# EAGLE board blank_card (EAGLE 9.6.2)

Size 100 x 80 mm. Coordinates in mm from the lower left corner, seen from the top.
Outline: 0,0 100,0 100,80 0,80 0,0
Copper layers (1*16): Top 0.035mm / dielectric 1.5mm / Bottom 0.035mm
Design rules "default": minimum track width 6mil, minimum drill 0.35mm, track to track 6mil, track to pad 6mil, pad to pad 6mil, via to via 6mil, smd to smd 6mil, copper to edge 40mil, drill to drill 6mil, minimum pad ring 10mil, minimum via ring 8mil, stop-mask expansion 4mil, vias tented up to drill 0mil, thermal gap 10mil
Net classes: 1 POWER: clearance 0.508 mm
Holes 3.4 mm at 2.84,5.64 2.84,74.36 97.16,74.36 97.16,5.64

## Footprints (pad centres in the part's own frame; a part is rotated, then mirrored left to right if it is on the bottom)
HARTING_09231486921 = drill 1 pad 1.35 square: 1 0,0 | drill 1 pad 1.35: 2 -2.54,0; 3 -5.08,0; 4 -7.62,0; 5 -10.16,0; 6 -12.7,0; 7 -15.24,0; 8 -17.78,0; 9 -20.32,0; 10 -22.86,0; 11 -25.4,0; 12 -27.94,0; 13 -30.48,0; 14 -33.02,0; 15 -35.56,0; 16 -38.1,0; 17 0,2.54; 18 -2.54,2.54; 19 -5.08,2.54; 20 -7.62,2.54; 21 -10.16,2.54; 22 -12.7,2.54; 23 -15.24,2.54; 24 -17.78,2.54; 25 -20.32,2.54; 26 -22.86,2.54; 27 -25.4,2.54; 28 -27.94,2.54; 29 -30.48,2.54; 30 -33.02,2.54; 31 -35.56,2.54; 32 -38.1,2.54; 33 0,5.08; 34 -2.54,5.08; 35 -5.08,5.08; 36 -7.62,5.08; 37 -10.16,5.08; 38 -12.7,5.08; 39 -15.24,5.08; 40 -17.78,5.08; 41 -20.32,5.08; 42 -22.86,5.08; 43 -25.4,5.08; 44 -27.94,5.08; 45 -30.48,5.08; 46 -33.02,5.08; 47 -35.56,5.08; 48 -38.1,5.08 | hole 2.8: -43.18,-2.54; 5.08,-2.54

## Placement (x,y rotation side)
J1  09231486921  [HARTING_09231486921]  5.6,20.95 270 top

## Library data of the parts
J1 = din41612_48_pin_board; AVAILABILITY: In Stock; COMMENT: 09231486921; DESCRIPTION: Conn DIN 41612 M 48 POS 2.54mm Solder RA Thru-Hole Tray; EU_ROHS_COMPLIANCE: Compliant; MF: HARTING; MP: 09231486921; PACKAGE: None; PRICE: 6$; PURCHASE-URL-DIGIKEY: https://www.digikey.ca/en/products/detail/harting/09231486921/3180439

## Nets
3.3V: J1.7 J1.23
5V: J1.38 J1.39
24V/12V [POWER]: J1.5 J1.6 J1.20 J1.21 J1.22 J1.36 J1.37
CS_1: J1.8
CS_2: J1.9
CS_3: J1.10
CS_4: J1.11
CS_5: J1.12
CS_6: J1.13
CS_7: J1.14
CS_8: J1.24
CS_9: J1.25
CS_10: J1.26
CS_11: J1.27
CS_12: J1.28
CS_13: J1.29
CS_14: J1.30
CS_15: J1.45
GND: J1.1 J1.2 J1.3 J1.4 J1.17 J1.18 J1.19 J1.33 J1.34 J1.35
MISO: J1.41
MOSI: J1.42
RESET: J1.48
SCK: J1.40
SCL: J1.44
SDA: J1.43
USB1_D+: J1.16
USB1_D-: J1.15
USB2_D+: J1.32
USB2_D-: J1.31
USB3_D+: J1.47
USB3_D-: J1.46

## Tracks (layer width: path | path; a pad name or v marks a point on that pad's centre or on a via)
3.3V  (1 unrouted)
5V  (1 unrouted)
24V/12V  (6 unrouted)
GND  (9 unrouted)